# Altium PCB BPM_Mainboard.PcbDoc
Units mil, origin at the board's own origin, x right, y up, seen from the top; angles counter-clockwise.
Board outline 3585 x 4010 mil, 2 copper layers (Top Layer, Bottom Layer); 48 components, 42 nets, 177 pads, 1 vias.
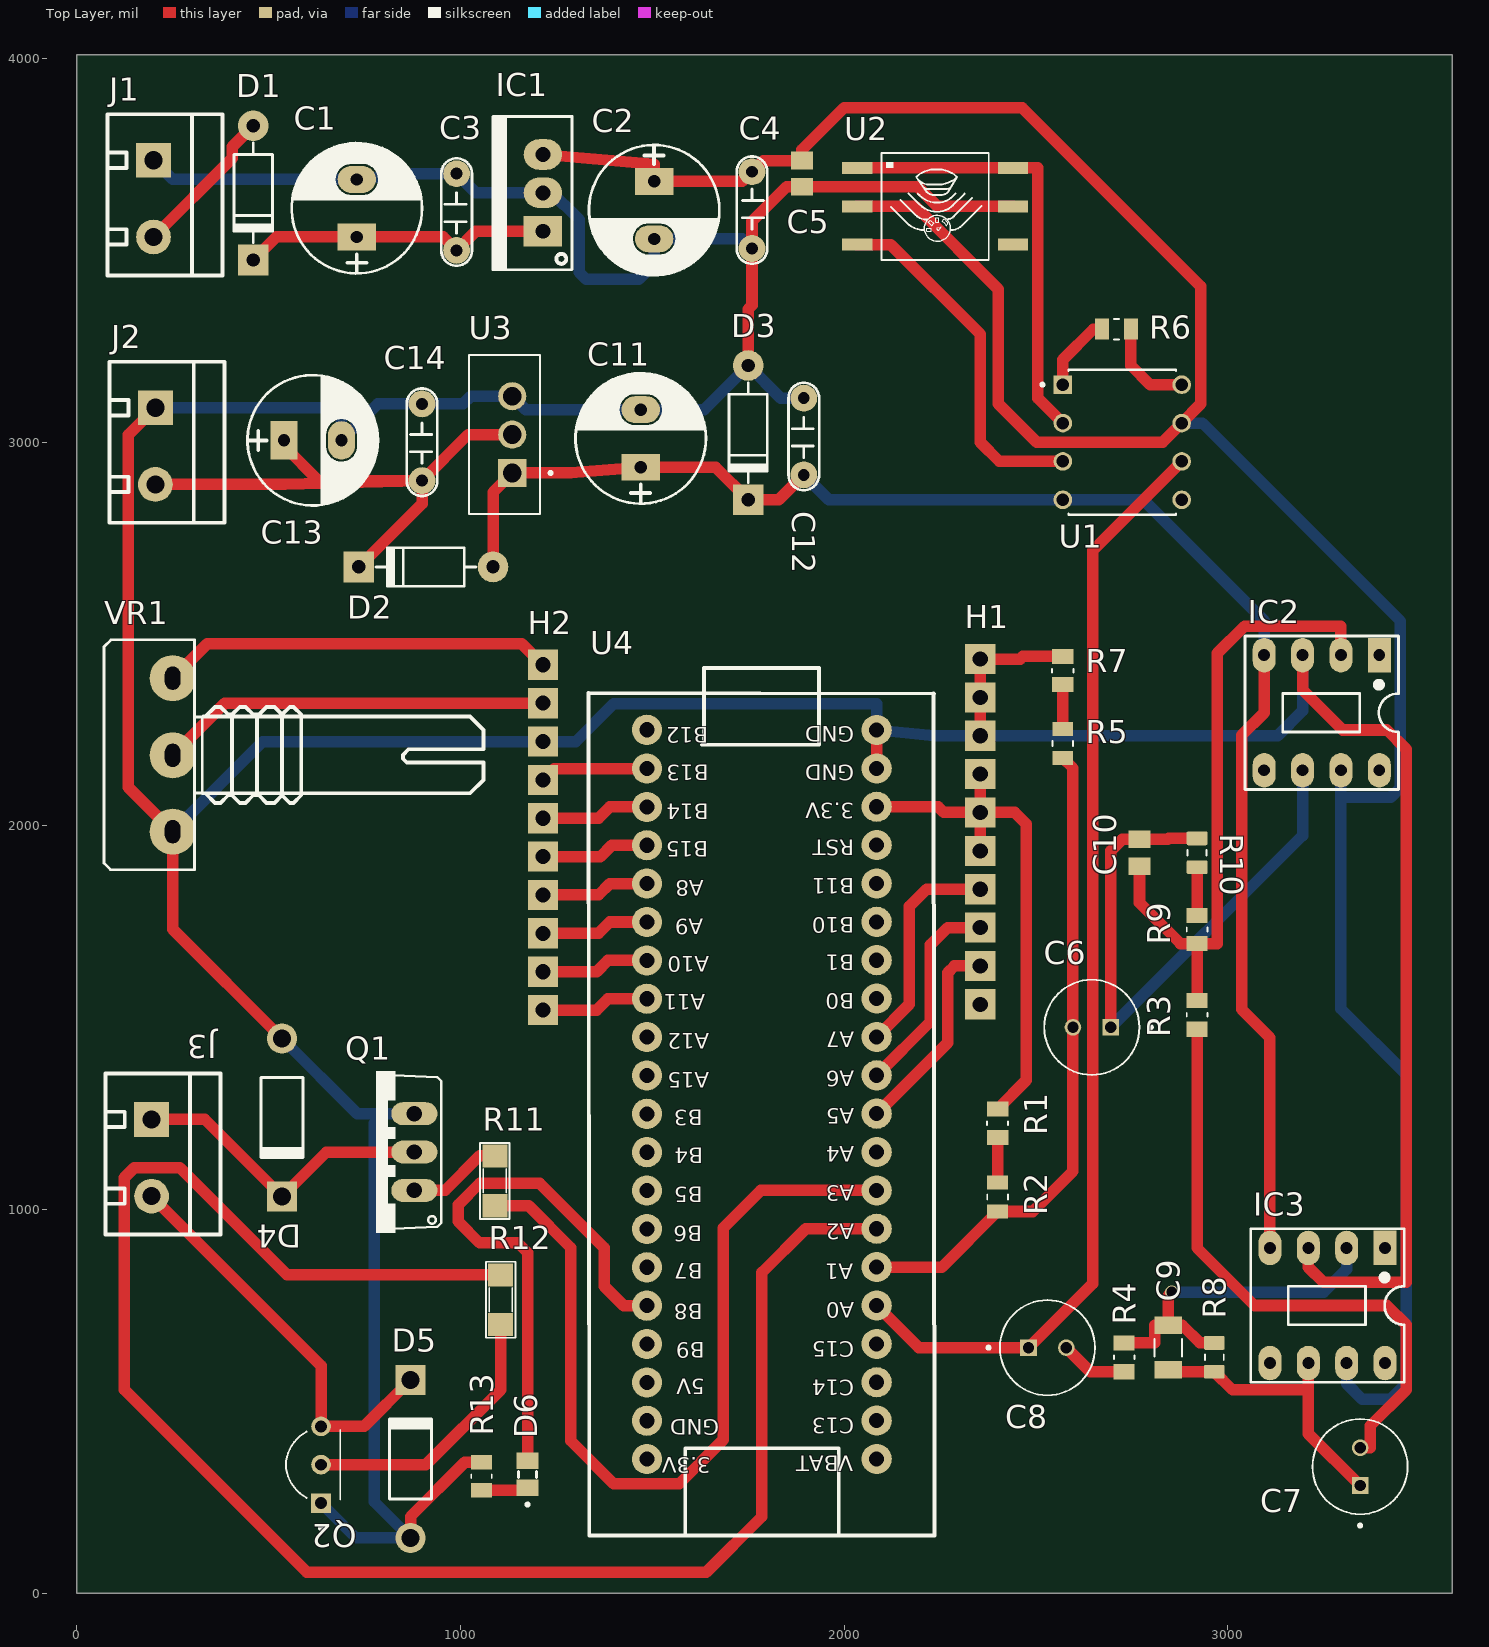
[diagram p0: Top Layer view]
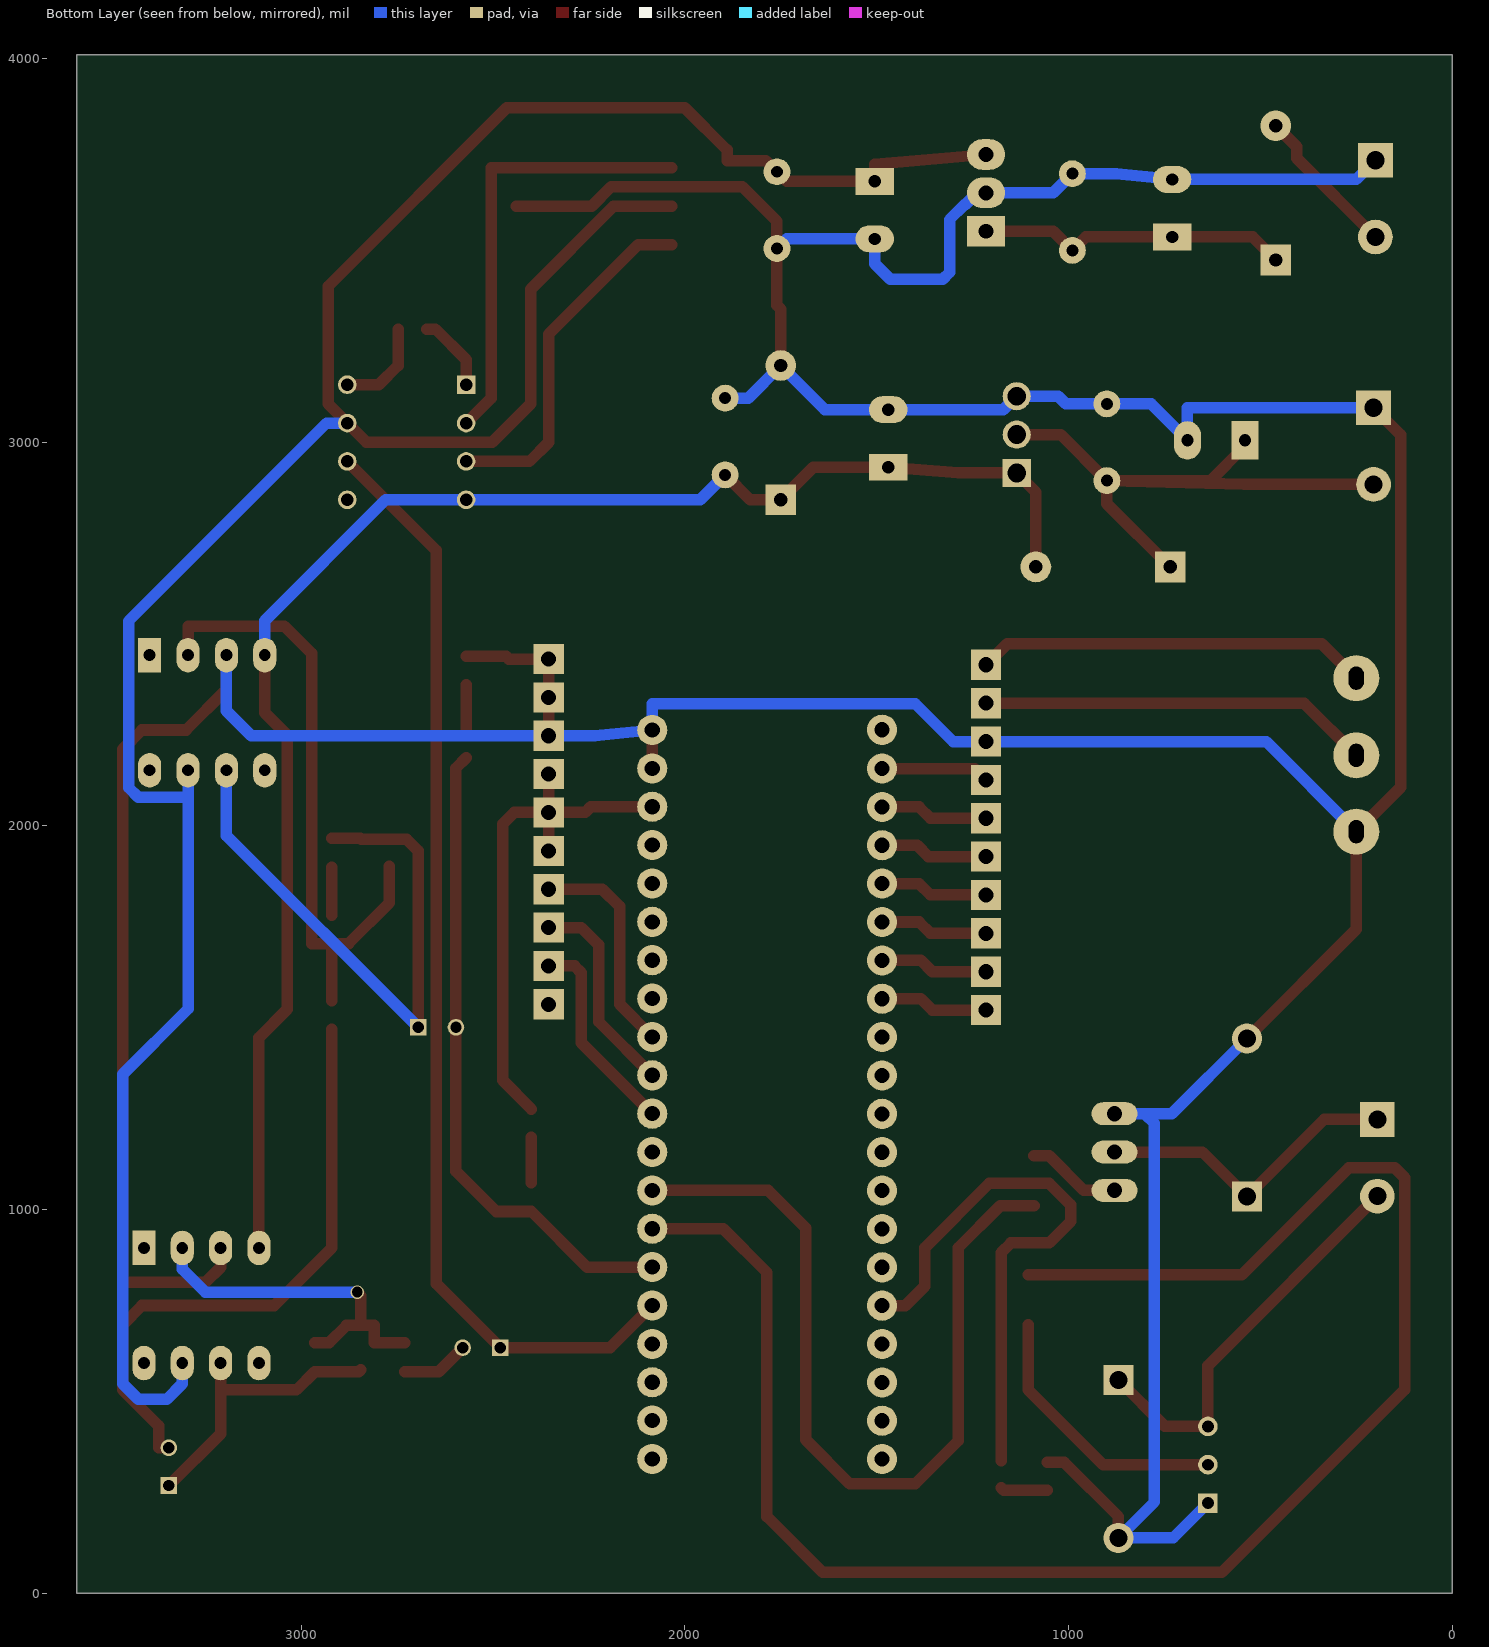
[diagram p1: Bottom Layer view, seen from below]

## Layer stack, top to bottom
Top Solder: solder mask 0.4, Solder Resist, Dk 3.5
Top Layer: signal copper 1.4
Dielectric 1: dielectric 12.6, FR-4, Dk 4.8
Bottom Layer: signal copper 1.4
Bottom Solder: solder mask 0.4, Solder Resist, Dk 3.5

## Board outline
0,0 0,4010 3585,4010 3585,0

## Design rules (kind name [scope] priority, off if disabled: settings)
Clearance [All] p1: gap=10 ignorepadtopadclearanceinfootprint=FALSE
PolygonConnect [All] p1: connectstyle=Relief reliefconductorwidth=10 reliefentries=4 polygonreliefangle="90 Angle" airgapwidth=10
RoutingVias [All] p1: holewidth=28 width=35 viastyle="Through Hole" minholewidth=28 minwidth=35 maxholewidth=28 maxwidth=35
SolderMaskExpansion [All] p1: expansion=4 istentingtop=FALSE
SupplyNets "Schematic Supply Nets" [InNet('GND')] p1: voltage=0.000
Width [All] p1: maxlimit=40 minlimit=20 preferedwidth=30
30 further rules are at their usual default settings.

## Components (designator, comment, footprint, x,y, rotation, side; value= is the part's Value field where it differs from the comment)
C1 "1000uF/16V" CP1.5/3.4 730,3535 r90 top
C2 "1000uF/16V" CP1.5/3.4 1505,3680 r270 top
C3 "104" CN2 990,3500 r90 top value=0.1uF
C4 "104" CN2 1760,3705 r270 top value=0.1uF
C5 "10nF" CAPC2012X145N 1890,3700 r270 top
C6 "47uF" CAPPRD250W50D630H1120 2645.79,1475 r180 top
C7 "47uF" CAPPRD250W50D630H1120 3345,330 r90 top
C8 "47uF" CAPPRD250W50D630H1120 2530,640 r0 top
C9 "220nF" CAPC3216X94N 2845,640 r270 top
C10 "27nF" CAPC2012X94N 2770,1930 r90 top
C11 "1000uF/16V" CP1.5/3.4 1470,2935 r90 top
C12 "104" CN2 1895,2915 r90 top value=0.1uF
C13 "1000uF/16V" CP1.5/3.4 540,3005 r0 top
C14 "104" CN2 900,2900 r90 top value=0.1uF
D1 "1N4007" D1A 460,3825 r90 top
D2 "1N4007" D1A 1085,2675 r0 top
D3 "1N4007" D1A 1750,3200 r90 top
D4 "Diode" DO-41 535,1240 r270 top
D5 "Diode" DO-41 870,350 r90 top
D6 "LED" LEDC2012X120N 1175,310 r90 top
H1 "Header 1x10" "Header 1x10 male" 2355,2235 r270 top
H2 "Header 1x10" "Header 1x10 male" 1215,1720 r90 top
IC1 "LM7805" QTO-220 1215,3550 r90 top
IC2 "LM741" DIP8/W0.3 3395,2445 r180 top
IC3 "LM741" DIP8/W0.3 3410,900 r180 top
J1 "KF301-2P" KF301-5.0-2P 200,3735 r270 top
J2 "" KF301-5.0-2P 205,3090 r270 top
J3 "" KF301-5.0-2P 195,1235 r270 top
Q1 "TIP41C" TO220AV 780,1150 r90 top
Q2 "2N2222A" TO92254P470H750-3 545,335 r90 top
R1 "2kR" RESC2012X60N#1 2400,1225 r270 top
R2 "62kR" RESC2012X60N#2 2400,1032.6 r90 top
R3 "10kR" RESC2012X65N#1 2920,1507.4 r90 top
R4 "10kR" RESC2012X65N#1 2730,615 r90 top
R5 "62kR" RESC2012X60N#2 2570,2215 r270 top
R6 "750R" RESC2012X60N#2 2710,3295 r180 top
R7 "2kR" RESC2012X60N#1 2570,2405 r90 top
R8 "120kR" RESC2012X60N#3 2965,615 r270 top
R9 "330kR" RESC2012X65N#2 2920,1730 r90 top
R10 "3kR" RESC2012X60N#3 2920,1930 r90 top
R11 "1k" SM-1206 1090,1075 r90 top value="R1/4W - 1K"
R12 "1k" SM-1206 1105,765 r270 top value="R1/4W - 1K"
R13 "200R" RESC2012X65N#2 1055,305 r270 top
U1 "AD620AN" DIP787W46P254L1016H533Q8 2725.08,3000 r0 top
U2 "" MPS20N0200D_Foot 2034.49,3715 r0 top
U3 "LM7905CT" TO254P1054X470X1955-3 1135,3020 r90 top
U4 "STM32F103C8T6" "Stm32 BluePill" 1794.2,1073.07 r180 top
VR1 "10K" VOL_1 250,1985 r90 top value="VR 10K"

## Footprints (in the part's own frame and the unit in brackets; to place one, negate y for a bottom-side part, rotate by r counter-clockwise, add the part's x,y. Pads: shape width x height; smd on the part's side, far side on the other; paste and mask are expansions set on the pad)
CAPC2012X94N [mm]
  rect 1.16x1.47 smd: 1(-0.88,0) 2(0.88,0)
CAPC2012X145N [mm]
  rect 1.17x1.47 smd: 1(-0.871,0) 2(0.871,0)
CAPC3216X94N [mm]
  rect 1.16x1.82 smd: 1(-1.475,0) 2(1.475,0)
  silkscreen extent -0.57,-0.9 0.57,0.9
CAPPRD250W50D630H1120 [mm]
  round 1.1 hole 0.75: N(1.25,0)
  rect 1.1x1.1 hole 0.75: P(-1.25,0)
  silkscreen extent -4,-3.15 3.15,3.15, body extent -3.15,-3.15 3.15,3.15, height 11.2
CN2 [mil]
  round 70 hole 31: 1(0,0) 2(200,0)
  silkscreen extent -40,-40 240,40, body extent -54,-44 260,55, height 407
CP1.5/3.4 [mil] "Tu hoa 220->470uF,16V, 470uF/16V,25V"
  rect 70x100 hole 32: 1(0,0)
  oval 70x100 hole 32: 2(150,0)
  silkscreen extent -95,-170 245,170, body extent -85,-157 230,157, height 446
D1A [mil] "Diode 1A, W 100mil, L 350mil"
  round 80 hole 35: 1(0,0)
  rect 80x80 hole 35: 2(-350,0)
  silkscreen extent -305,-50 -45,50, body extent -386,-33 34,36, height 84
DIP8/W0.3 [mil] "8 PIN, W 300mil, Pin to pin 100mil"
  rect 60x90 hole 31: 1(0,0)
  oval 60x90 hole 31: 2(100,0) 3(200,0) 4(300,0) 5(300,300) 6(200,300) 7(100,300) 8(0,300)
  silkscreen extent -50,-50 350,350, body extent -50,-40 350,336, height 201
DIP787W46P254L1016H533Q8 [mm]
  rect 1.23x1.23 hole 0.82: 1(-3.935,3.81)
  round 1.23 hole 0.82: 2(-3.935,1.27) 3(-3.935,-1.27) 4(-3.935,-3.81) 5(3.935,-3.81) 6(3.935,-1.27) 7(3.935,1.27) 8(3.935,3.81)
  silkscreen extent -5.38,-4.8 3.56,4.8, body extent -5.46,-4.64 5.46,4.64, height 5.33
DO-41 [mm] "Diode, Axial; Body 5.2 x 2.7 mm (LxDia. max), Lead Dia. 0.86 mm (max)"
  round 2 hole 1.2: 1(-5.23,0)
  rect 2x2 hole 1.2: 2(5.23,0)
  silkscreen extent -2.65,-1.41 2.75,1.4
"Header 1x10 male" [mm] "2.54mm"
  rect 2x2 hole 1: 1(-5.08,0) 2(-2.54,0) 3(0,0) 4(2.54,0) 5(5.08,0) 6(7.62,0) 7(10.16,0) 8(12.7,0) 9(15.24,0) 10(17.78,0)
  body extent -6.35,-1.27 19.05,1.27, height 8.6
KF301-5.0-2P [mm] "¿ÉÆ´½Ó¶Ë×Ó/6A"
  rect 2.3x2.3 hole 1.2: 1(0,0)
  round 2.3 hole 1.2: 2(5.08,0)
  silkscreen extent -3.05,-3.05 7.62,4.57, body extent -3,-3.09 7.5,4.51, height 10.05
LEDC2012X120N [mm]
  rect 1.1x1.45 smd: A(0.9,0) C(-0.9,0)
  silkscreen extent -2.1,-0.6 0.2,0.6
MPS20N0200D_Foot [mm]
  rect 2x0.8 smd: 1(0,0) 2(0,-2.54) 3(0,-5.08) 4(10.3,-5.08) 5(10.3,-2.54) 6(10.3,0)
  silkscreen extent 1.6,-6.1 8.7,1, body extent -0.58,-6.04 10.9,0.96, height 9.5
QTO-220 [mil] "TO-220 - 1-2-3"
  rect 80x100 hole 39: 1(0,0)
  oval 80x100 hole 39: 2(100,0) 3(200,0)
  silkscreen extent -100,-76 300,130, body extent -119,-64 322,121, height 755
RESC2012X60N#1 [mm]
  rect 1x1.42 smd: 1(-0.935,0) 2(0.935,0)
  silkscreen extent -0.12,-0.7 0.12,0.7
RESC2012X60N#2 [mm]
  rect 0.92x1.38 smd: 1(-0.955,0) 2(0.955,0)
  silkscreen extent -0.17,-0.68 0.17,0.68
RESC2012X60N#3 [mm]
  rrect25% 0.92x1.38 smd: 1(-0.955,0) 2(0.955,0)
  silkscreen extent -0.18,-0.62 0.18,0.62, body extent -1,-0.63 1,0.63, height 0.3
RESC2012X65N#1 [mm]
  rect 1.01x1.38 smd: 1(-0.95,0) 2(0.95,0)
  silkscreen extent -0.12,-0.68 0.12,0.68
RESC2012X65N#2 [mm]
  rect 0.97x1.38 smd: 1(-0.93,0) 2(0.93,0)
  silkscreen extent -0.12,-0.68 0.12,0.68
SM-1206 [mil] "Compoment SMD 120x60mil"
  rect 60x65 smd: 1(-65,0) 2(65,0)
  silkscreen extent -99,-38 99,39, body extent -83,-35 83,36, height 25
"Stm32 BluePill" [mm]
  round 2 hole 1: 1(7.828,-29.908) 2(7.828,-27.343) 3(7.828,-24.803) 4(7.828,-22.263) 5(7.828,-19.723) 6(7.828,-17.183) 7(7.828,-14.643) 8(7.828,-12.103) 9(7.828,-9.563) 10(7.828,-7.023) 11(7.828,-4.483) 12(7.828,-1.943) 13(7.828,0.597) 14(7.828,3.137) 15(7.828,5.677) 16(7.828,8.217) 17(7.828,10.757) 18(7.828,13.297) 19(7.828,15.837) 20(7.828,18.377) 21(-7.386,18.366) 22(-7.386,15.826) 23(-7.386,13.286) 24(-7.386,10.746) 25(-7.386,8.206) 26(-7.386,5.666) 27(-7.386,3.126) 28(-7.386,0.586) 29(-7.386,-1.954) 30(-7.386,-4.494) 31(-7.386,-7.034) 32(-7.386,-9.574) 33(-7.386,-12.114) 34(-7.386,-14.654) 35(-7.386,-17.194) 36(-7.386,-19.734) 37(-7.386,-22.274) 38(-7.386,-24.814) 39(-7.386,-27.354) 40(-7.386,-29.894)
  silkscreen extent -11.22,-34 11.69,23.43, body extent -11.18,-33.27 11.68,24.29, height 12.31
TO220AV [mil]
  oval 60x120 hole 40: B(-100,-100) C(0,-100) E(100,-100)
  silkscreen extent -210,-170 210,0, body extent -203,-90 203,90, height 875
TO254P1054X470X1955-3 [mm]
  rect 1.86x1.86 hole 1.24: 1(-2.54,0)
  round 1.86 hole 1.24: 2(0,0) 3(2.54,0)
  silkscreen extent -5.27,-2.64 5.27,2.86, body extent -5.08,-1.71 5.08,2.86, height 29.34
TO92254P470H750-3 [mm]
  rect 1.298x1.298 / inner round 1.298 / far side rect 1.298x1.298 hole 0.79: 1(-2.54,-2.33)
  round 1.298 hole 0.79: 2(0,-2.33) 3(2.54,-2.33)
  silkscreen extent -4.29,-3.6 2.3,0, body extent -2.74,-4.6 2.74,12.5, height 2.3
VOL_1 [mil]
  round 120 hole 40 slot 60 at 0 deg: 1(0,0) 2(199,0) 3(400,0)
  silkscreen extent -99,-810 500,179, body extent -110,-818 510,188, height 839

## Part data
C1 C2 C11 C13: library part CP4, "Cap 1000uF/16V - 220uF/50V", Description 1="2200uF-3300uF/6,3V - 1000uF-2200uF/10V", Description 2="1000uF/16V - 470uF => 1000uF/25V - 100uF/100V", Description 3=330uF>470uF/35V_220uF>470uF/50V_10uF>22uF/250V, Description 4="220uF => 330uF/63V - 10uF =>33uF/160 - 200V", Description 5="4,7uF>10uF/250V_3,3uF>10uF/400V - 2,2uF>4,7uF/450V"
C3 C4 C12 C14: library part CN2, "Cap np 104 => 105pF"
C5: library part VJ0805Y103KXAMC, "0805 10nF 50 V Â±10 % Tolerance X7R SMT Multilayer Ceramic Chip Capacitor", Package="0805 Vishay", Availability="In Stock", Check_prices=https://www.snapeda.com/parts/VJ0805Y103KXAMC/Vishay%20Vitramon/view-part/1823129/?ref=eda, MF="Vishay Vitramon", MP=VJ0805Y103KXAMC, Price=None, Purchase-URL=https://pricing.snapeda.com/search/part/VJ0805Y103KXAMC/?ref=eda, SnapEDA_Link=https://www.snapeda.com/parts/VJ0805Y103KXAMC/Vishay%20Vitramon/view-part/1823129/?ref=snap
C6 C7 C8: library part EEUFR1H470, "47ÂµF 50V Aluminum Electrolytic Capacitors Radial, Can 5000 Hrs @ 105Â°C", Package="RADIAL-2 Panasonic", Availability="In Stock", Check_prices=https://www.snapeda.com/parts/EEUFR1H470/Panasonic/view-part/?ref=eda, MF=Panasonic, MP=EEUFR1H470, Price=None, Purchase-URL=https://pricing.snapeda.com/search/part/EEUFR1H470/?ref=eda, SnapEDA_Link=https://www.snapeda.com/parts/EEUFR1H470/Panasonic/view-part/?ref=snap
C9: library part 12061C123KAT2A, "Cap Ceramic 0.012uF 100V X7R 10% SMD 1206 125Â°C Paper T/R", Package=None, Availability=Unavailable, MP=12061C123KAT2A, Price=None
C10: library part LD055C273KAB2A, "Cap Ceramic 0.027uF 50V X7R 10% SMD 0805 125Â°C Paper T/R", Package=None, Availability=Unavailable, MP=LD055C273KAB2A, Price=None
D1 D2 D3: library part D1A, "Diode 1A"
D4 D5: library part "Diode 1N4007", "1 Amp General Purpose Rectifier", Code_JEDEC=DO-204-AL, ComponentLink1Description="Manufacturer Link", ComponentLink1URL=http://www.fairchildsemi.com/, ComponentLink2Description=Datasheet, ComponentLink2URL=http://www.fairchildsemi.com/ds/1N%2F1N4001.pdf, DatasheetVersion=1998, LatestRevisionDate=17-Jul-2002, LatestRevisionNote="Re-released for DXP Platform.", PackageDescription="Diode, Axial; Body 5.2 x 2.7 mm (LxDia. max), Lead Dia. 0.86 mm (max)", PackageReference=DO-41, PackageVersion=Aug-1999, Published=8-Jun-2000, Publisher="Altium Limited"
D6: library part SML-LXT0805SRW-TR, "LED RED DIFFUSED 0805 SMD", Package=None, Availability=Unavailable, MP=SML-LXT0805SRW-TR, Price=None
IC1: library part LM78xx, "On ap +, from + 5 to + 24VDC"
IC2 IC3: "Single OA"
J2 J3: library part Terminal_block1
Q1: "Bipolar _BJT_ Transistor NPN 100V 6A 3MHz 2W Through Hole TO-220-3", Package="TO-220-3 Central Semiconductor", Availability=Unavailable, MF="Central Semiconductor", MP=TIP41C, Price=None, SnapEDA_Link=https://www.snapeda.com/parts/TIP41C/Central%20Semiconductor%20Corp/view-part/2759871/?ref=snap
Q2: "Bipolar (BJT) Transistor NPN 40 V 600 mA 250MHz 625 mW Through Hole TO-92", Package="TO-92-3 Diotec", Availability="In Stock", Check_prices=https://www.snapeda.com/parts/2N2222A/Diotec/view-part/?ref=eda, MF="Diotec Semiconductor", MP=2N2222A, Price=None, Purchase-URL=https://pricing.snapeda.com/search/part/2N2222A/?ref=eda, SnapEDA_Link=https://www.snapeda.com/parts/2N2222A/Diotec/view-part/?ref=snap
R1 R7: library part CR0805-JW-202ELF, Package=None, Availability=Unavailable, MP=CR0805-JW-202ELF, Price=None
R2 R5: library part RC0805JR-0762KL, "Resistor: thick film; SMD; 0805; 62kÎ©; 0.125W; Â±5%; -55Ã·155Â°C", Package=None, Availability=Unavailable, MP=RC0805JR-0762KL, Price=None
R3 R4: library part RMCF0805FT10K0, Package=None, Availability=Unavailable, MF="{'manufacturer': u'Stackpole Electronics Inc'}", MP=RMCF0805FT10K0, Price=None
R6: library part AF0805JR-07750RL, Package=None, Availability=Unavailable, MP=AF0805JR-07750RL, Price=None
R8: library part RC0805FR-13120KL, Package=None, Availability=Unavailable, MP=RC0805FR-13120KL, Price=None
R9: library part SFR10EZPF3303, Package=None, Availability=Unavailable, MP=SFR10EZPF3303, Price=None
R10: library part RC0805FR-133KL, Package=None, Availability=Unavailable, MF="{'manufacturer': u'YAGEO'}", MP=RC0805FR-133KL, Price=None
R11 R12: library part R, "Resistor 1/4W"
R13: library part MCR10EZPJ201, Package=None, Availability=Unavailable, MP=MCR10EZPJ201, Price=None
U1: "Instrumentation Amplifier 1 Circuit - 8-PDIP", Package="PDIP-8 Linear Technology", Availability="In Stock", Check_prices=https://www.snapeda.com/parts/AD620AN/Analog+Devices+Inc./view-part/?ref=eda, MF="Analog Devices", MP=AD620AN, Price=None, Purchase-URL=https://pricing.snapeda.com/search/part/AD620AN/?ref=eda, SnapEDA_Link=https://www.snapeda.com/parts/AD620AN/Analog+Devices+Inc./view-part/?ref=snap
U2: library part MPS20N0200D, "Pressure Sensor"
U3: "Linear Voltage Regulator IC 1 Output 1A TO-220-3", Package="TO-220 Texas Instruments", Availability=Warning, Check_prices=https://www.snapeda.com/parts/LM7905CT/ON%20Semiconductor/view-part/1592440/?ref=eda, MF="ON Semiconductor", MP=LM7905CT, Price=None, Purchase-URL=https://pricing.snapeda.com/search/part/LM7905CT/?ref=eda, SnapEDA_Link=https://www.snapeda.com/parts/LM7905CT/ON%20Semiconductor/view-part/1592440/?ref=snap
U4: library part BluePill, "Designed By @Alixahedi"
VR1: library part "Var Resitor", "Var Resistor"

## Via types
v1: diameter 35, hole 28, Top Layer to Bottom Layer, 1 vias

## Nets (pads, with @x,y where several pads share a name; then routed paths per layer and width w, separated by ;. In a path a pad name is that pad's centre, name@x,y a point inside that pad or via, vN(x,y) a via of type N, cw(c..) or ccw(c..) an arc to the next point about the centre after c; other vN are vias at no path point)
GND: C1.2 C2.2 C3.2 C4.2 C5.2 C11.2 C12.2 C13.2 C14.2 D3.1 D4.1 D5.1 H1.1 H1.2 H1.3 H2.8 IC1.2 IC2.3 IC3.3 J1.1 J2.1 Q1.E Q2.1 R7.2 R13.1 U2.5 U3.3 U4.39 U4.40 VR1.1 | length 14876.2
  Top Layer w30: J2.1 134,3019 134,2101 VR1.1 250,1730.91 D4.1 ; D5.1 870,200 1011.61,341.61 R13.1 ; D3.1 1750,3347 1760,3357 C4.2 1760,3575.71 1850,3665.71 C5.2 2192.29,3665.71 2243,3615 U2.5 ; U4.39 U4.40 ; H1.3 H1.2 H1.1 2459,2435 2465.81,2441.81 R7.2 ; IC2.3 3195,2355 3300,2250 3415,2250 3465,2200 3465,810 3250,810 3210,850 IC3.3
  Bottom Layer w30: J1.1 250,3685 C1.2 875,3700 C3.2 1040,3650 IC1.2 1238.53,3650 1269.31,3619.22 1271.14,3619.22 1310,3580.36 1310,3442.57 1327.57,3425 1465,3425 1505,3465 C2.2 1735,3530 C4.2 ; J2.1 690,3090 C13.2 785,3100 C14.2 1007,3100 1027,3120 U3.3 1170,3085 C11.2 1635,3085 D3.1 1835,3115 C12.2 ; VR1.1 485,2220 H2.8 1301,2220 1400,2319 2085,2319 U4.40 2235,2235 H1.3 3130,2235 3195,2300 IC2.3 ; D4.1 730.91,1250 801,1250 ; Q2.1 727.64,144.09 D5.1 776,238.09 776,1225 801,1250 ; Q1.E 801,1250
NetC1_1: C1.1 C3.1 D1.2 IC1.1 | length 815.1
  Top Layer w30: D1.2 520,3535 C1.1 955,3535 C3.1 1040,3550 IC1.1
NetC2_1: C2.1 C4.1 C5.1 IC1.3 IC2.7 IC3.7 U1.7 U2.2 | length 7017.3
  Top Layer w30: IC1.3 1505,3725 C2.1 1735,3680 C4.1 1789.29,3734.29 C5.1 1890,3762 2000,3872 2464,3872 2930,3406 2930,3100 U1.7 2830,3000 2502,3000 2402,3100 2402,3399 2186,3615 U2.2
  Bottom Layer w30: U1.7 2934,3050 3450,2534 3450,2100 3425,2075 3295,2075 ; IC2.7 3295,2075 ; IC3.7 3310,546 3350,506 3425,506 3465,546 3465,1353 3295,1523 3295,2075
NetC6_N: C6.N R2.1 R5.2 U4.26 | length 1703.5
  Top Layer w30: U4.26 2255,850 R2.1 2491.58,995 2596.58,1100 C6.N 2596.58,2150.83 R5.2
NetC6_P: C6.P C10.2 IC2.6 R10.2 | length 1575.4
  Top Layer w30: C6.P 2695,1934.65 2725,1964.65 C10.2 2843,1964.65 2845.95,1967.6 R10.2
  Bottom Layer w30: C6.P 3195,1975 IC2.6
NetC7_N: C7.N R3.1 | length 1583.6
  Top Layer w30: R3.1 2920,900 3070,750 3415,750 3465,700 3465,530 3371,436 3371,379.21 C7.N
NetC7_P: C7.P C9.2 IC3.6 R8.2 | length 761.6
  Top Layer w30: C9.2 2849.53,577.4 R8.2 3012.4,530 3210,530 ; IC3.6 3210,530 ; C7.P 3210,415.79 3210,530
NetC8_N: C8.N R4.1 | length 176.6
  Top Layer w30: C8.N 2641.62,577.6 R4.1
NetC8_P: C8.P U1.6 U4.25 | length 2916.7
  Top Layer w30: U4.25 2195,640 C8.P 2648,807.21 2648,2718 U1.6
NetC9_1: C9.1 IC3.2 R4.2 R8.1 | length 926
  Top Layer w30: R4.2 2809.67,652.4 2809.67,698.07 C9.1 ; v1(2854,785) 2845,776 C9.1 ; R8.1 2927.47,652.6 2882,698.07 C9.1
  Bottom Layer w30: v1(2854,785) 3250,785 3310,845 IC3.2
NetC10_1: C10.1 IC2.2 R3.2 R9.1 | length 1675.1
  Top Layer w30: C10.1 2770,1800 2876.61,1693.39 R9.1 ; R3.2 R9.1 ; IC2.2 3295,2521 3044,2521 2973,2450 2973,1693.39 R9.1
NetC11_1: C11.1 C12.1 D2.1 D3.2 IC2.4 IC3.4 U1.4 U3.1 | length 4135.9
  Top Layer w30: D2.1 1085,2870 U3.1 1287,2920 C11.1 1665,2935 D3.2 1830,2850 C12.1 ; IC2.4 3095,2295 3036,2236 3036,1522 3110,1448 IC3.4
  Bottom Layer w30: C12.1 1960,2850 U1.4 2780,2850 3095,2535 IC2.4
NetC13_1: C13.1 C14.1 D2.2 J2.2 U3.2 | length 1685.5
  Top Layer w30: J2.2 542,2890 C14.1 ; C13.1 540,2990 630,2900 C14.1 ; D2.2 900,2840 C14.1 ; U3.2 1020,3020 C14.1
NetD1_1: D1.1 J1.2 | length 397.7
  Top Layer w30: J1.2 405,3740 405,3770 D1.1
NetD4_2: D4.2 J3.1 Q1.C | length 816.2
  Top Layer w30: J3.1 334.09,1235 D4.2 650.91,1150 Q1.C
NetD5_2: D5.2 J3.2 Q2.3 | length 1066.3
  Top Layer w30: J3.2 636.73,593.27 Q2.3 749.09,435 D5.2
NetD6_A: D6.A U4.16 | length 1505.8
  Top Layer w30: D6.A 1175,888 1150,913 1050,913 994,969 994,1012 1050,1068 1207,1068 1375,900 1375,800 1425.43,749.57 U4.16
NetD6_C: D6.C R13.2 | length 122.6
  Top Layer w30: R13.2 1168.82,268.39 D6.C
NetH1_4: H1.4 H1.5 H1.6 R1.1 U4.38 | length 1382.9
  Top Layer w30: U4.38 2245,2050 2260,2035 H1.5 ; H1.6 H1.5 ; H1.4 H1.5 ; R1.1 2475,1336.81 2475,2005 2445,2035 H1.5
NetH1_7: H1.7 U4.32 | length 578.8
  Top Layer w30: U4.32 2170,1535 2170,1790 2215,1835 H1.7
NetH1_8: H1.8 U4.31 | length 546.6
  Top Layer w30: U4.31 2225,1490 2225,1690 2270,1735 H1.8
NetH1_9: H1.9 U4.30 | length 536.3
  Top Layer w30: U4.30 2270,1435 2270,1617.43 2287.57,1635 H1.9
NetH2_1: H2.1 U4.8 | length 283.2
  Top Layer w30: H2.1 1355,1520 1384.57,1549.57 U4.8
NetH2_2: H2.2 U4.7 | length 283.2
  Top Layer w30: H2.2 1355,1620 1384.57,1649.57 U4.7
NetH2_3: H2.3 U4.6 | length 283.2
  Top Layer w30: H2.3 1360,1720 1389.57,1749.57 U4.6
NetH2_4: H2.4 U4.5 | length 283.2
  Top Layer w30: H2.4 1360,1820 1389.57,1849.57 U4.5
NetH2_5: H2.5 U4.4 | length 283.2
  Top Layer w30: H2.5 1365,1920 1394.57,1949.57 U4.4
NetH2_6: H2.6 U4.3 | length 283.2
  Top Layer w30: H2.6 1360,2020 1389.57,2049.57 U4.3
NetH2_7: H2.7 U4.2 | length 283.2
  Top Layer w30: H2.7 1244.57,2149.57 U4.2
NetH2_9: H2.9 VR1.2 | length 1021.3
  Top Layer w30: VR1.2 386,2320 H2.9
NetH2_10: H2.10 VR1.3 | length 1025.1
  Top Layer w30: VR1.3 340,2475 1160,2475 H2.10
NetQ1_B: Q1.B R11.2 | length 247.3
  Top Layer w30: Q1.B 960,1050 1050,1140 R11.2
NetQ2_2: Q2.2 R12.2 | length 719
  Top Layer w30: Q2.2 910,335 1105,530 R12.2
NetR1_2: R1.2 R2.2 | length 118
  Top Layer w30: R2.2 R1.2
NetR5_1: R5.1 R7.1 | length 115.6
  Top Layer w30: R5.1 R7.1
NetR6_1: R6.1 U1.8 | length 248.1
  Top Layer w30: R6.1 2747.6,3200 2797.6,3150 U1.8
NetR6_2: R6.2 U1.1 | length 200.5
  Top Layer w30: U1.1 2570.16,3215.16 2650,3295 R6.2
NetR9_2: R9.2 R10.1 | length 125.8
  Top Layer w30: R9.2 R10.1
NetR11_1: R11.1 U4.28 | length 2230.2
  Top Layer w30: R11.1 1178,1010 1288,900 1288,397 1400,285 1570,285 1685,400 1685,952 1783,1050 U4.28
NetR12_1: R12.1 U4.27 | length 4560.8
  Top Layer w30: R12.1 548,830 269,1109 150,1109 124,1083 124,531 600,55 1641,55 1786,200 1786,836 1900,950 U4.27
NetU1_2: U1.2 U2.1 U2.6 | length 1162.5
  Top Layer w30: U2.1 U2.6 2505,3715 2505,3115.16 U1.2
NetU1_3: U1.3 U2.3 | length 934.9
  Top Layer w30: U2.3 2122,3515 2355,3282 2355,3000 2405,2950 U1.3
pads on no net: H1.10 IC2.1 IC2.5 IC2.8 IC3.1 IC3.5 IC3.8 U1.5 U2.4 U4.1 U4.9 U4.10 U4.11 U4.12 U4.13 U4.14 U4.15 U4.17 U4.18 U4.19 U4.20 U4.21 U4.22 U4.23 U4.24 U4.29 U4.33 U4.34 U4.35 U4.36 U4.37

## Text inside footprints (layer, text, board x,y; h text height)
U4: Top Overlay "B12" at 1646.6,2272.07 h70 r180; Top Overlay "GND" at 2027,2274.3 h70 r180; Top Overlay "B13" at 1647,2173.3 h70 r180; Top Overlay "GND" at 2027,2173.3 h70 r180; Top Overlay "A1" at 2024.2,873.07 h70 r180; Top Overlay "A0" at 2027,772.3 h70 r180; Top Overlay "C14" at 2027,570.3 h70 r180; Top Overlay "C13" at 2027,472.3 h70 r180; Top Overlay "C15" at 2027,671.3 h70 r180; Top Overlay "B6" at 1630.8,972.3 h70 r180; Top Overlay "B4" at 1633.3,1175.07 h70 r180; Top Overlay "B7" at 1632,875.07 h70 r180; Top Overlay "B14" at 1647.8,2072.07 h70 r180; Top Overlay "B5" at 1632,1073.3 h70 r180; Top Overlay "VBAT" at 2024.14,373.07 h70 r180; Top Overlay "A10" at 1649.1,1674.3 h70 r180; Top Overlay "A12" at 1649.1,1474.07 h70 r180; Top Overlay "A15" at 1649.1,1372.3 h70 r180; Top Overlay "A9" at 1633.3,1772.3 h70 r180; Top Overlay "B3" at 1632,1274.3 h70 r180; Top Overlay "A11" at 1637.8,1575.07 h70 r180; Top Overlay "A8" at 1634.5,1873.3 h70 r180; Top Overlay "B15" at 1646.6,1974.3 h70 r180; Top Overlay "3.3V" at 2027,2075.3 h70 r180; Top Overlay "B1" at 2027,1679.07 h70 r180; Top Overlay "B0" at 2027,1578.3 h70 r180; Top Overlay "A7" at 2027,1478.07 h70 r180; Top Overlay "A6" at 2027,1376.3 h70 r180; Top Overlay "B11" at 2027,1878.07 h70 r180; Top Overlay "B10" at 2027,1776.3 h70 r180; Top Overlay "RST" at 2027,1978.3 h70 r180; Top Overlay "A4" at 2027,1179.07 h70 r180; Top Overlay "A3" at 2027,1077.3 h70 r180; Top Overlay "A2" at 2027,977.07 h70 r180; Top Overlay "A5" at 2027,1278.3 h70 r180; Top Overlay "GND" at 1674.2,467.3 h70 r180; Top Overlay "3.3V" at 1652,368.3 h70 r180; Top Overlay "B8" at 1632,768.3 h70 r180; Top Overlay "B9" at 1637,668.3 h70 r180; Top Overlay "5V" at 1637,573.3 h70 r180